# Altium PCB SNA.PcbDoc
Units mm, origin at the board's own origin, x right, y up, seen from the top; angles counter-clockwise.
Board outline 35.98 x 47.66 mm, 4 copper layers (Top Layer, Internal Plane 1, Internal Plane 2, Bottom Layer), stack 0.758 mm thick; 135 components, 90 nets, 432 pads, 225 vias.
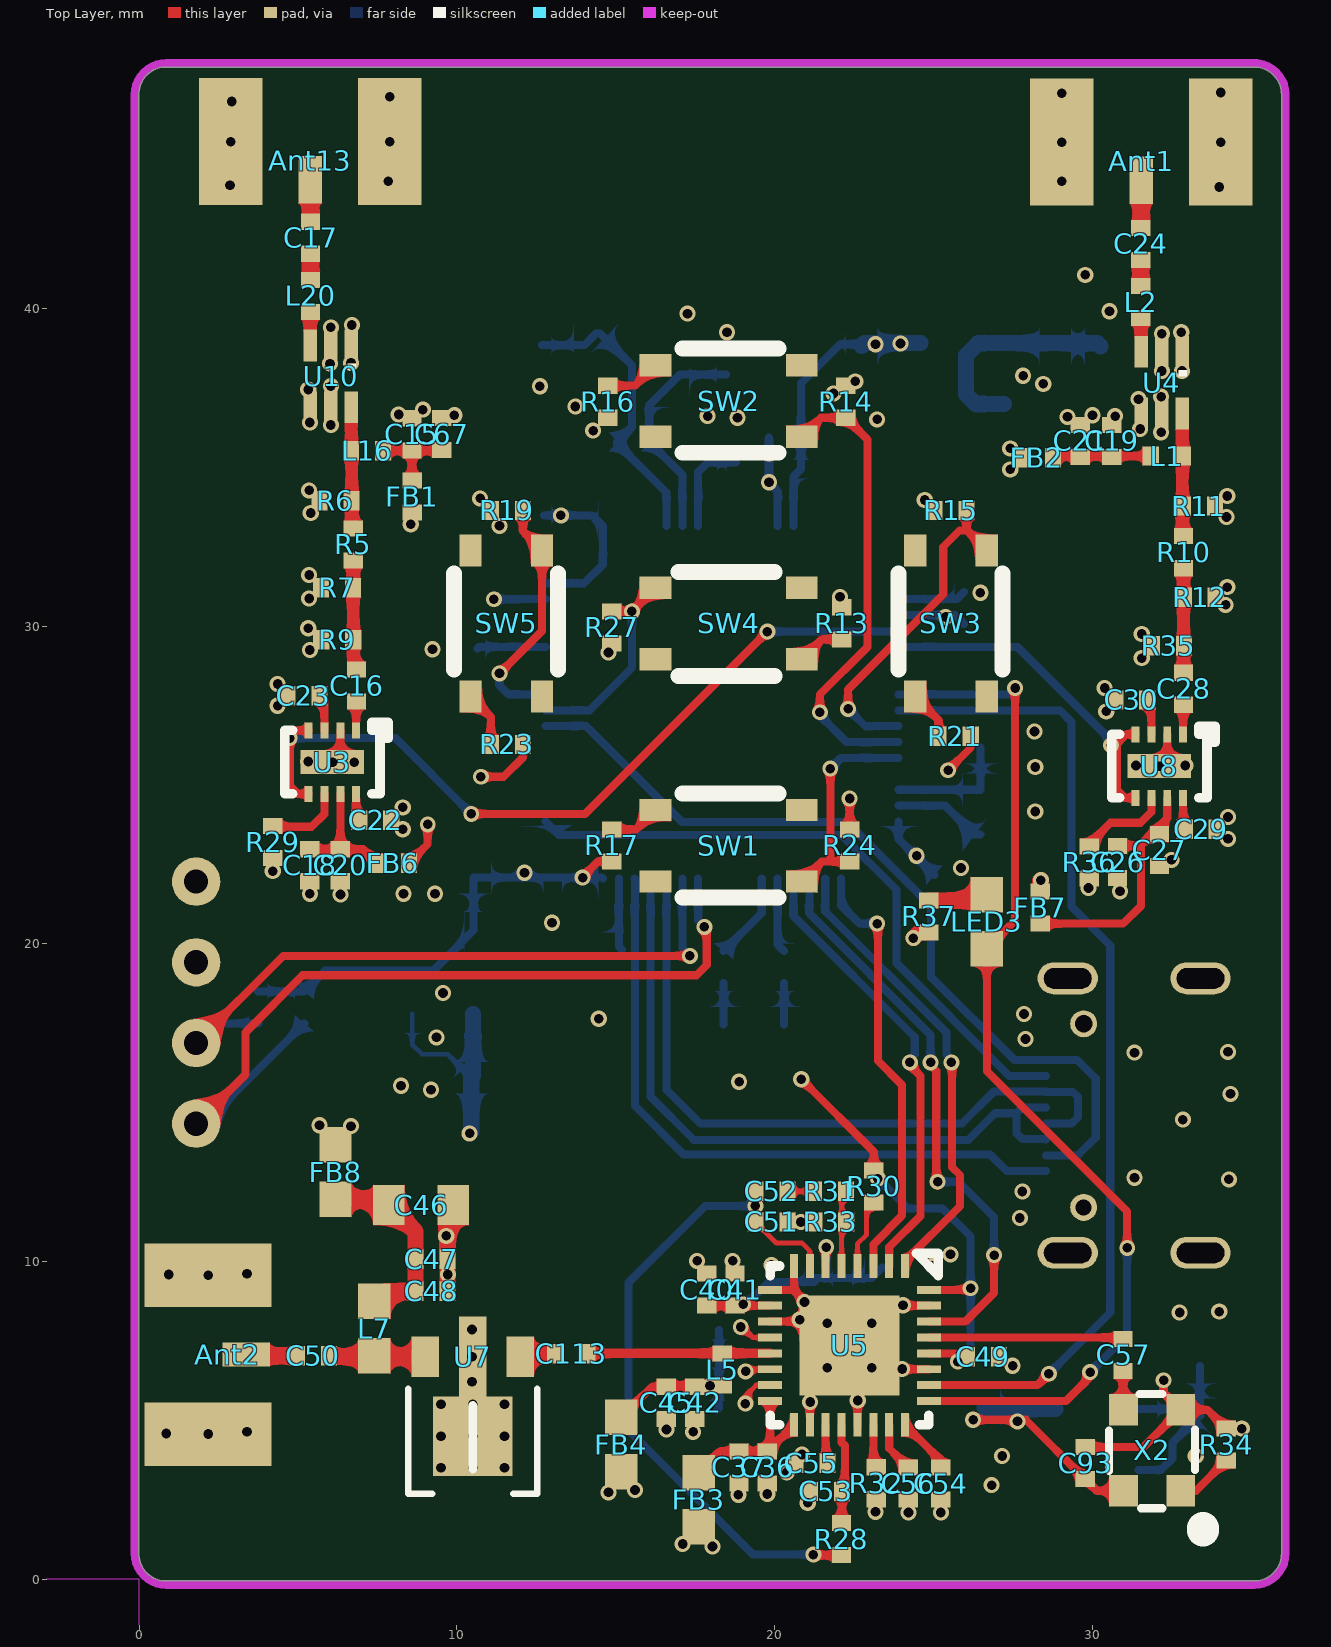
[diagram p0: Top Layer view]
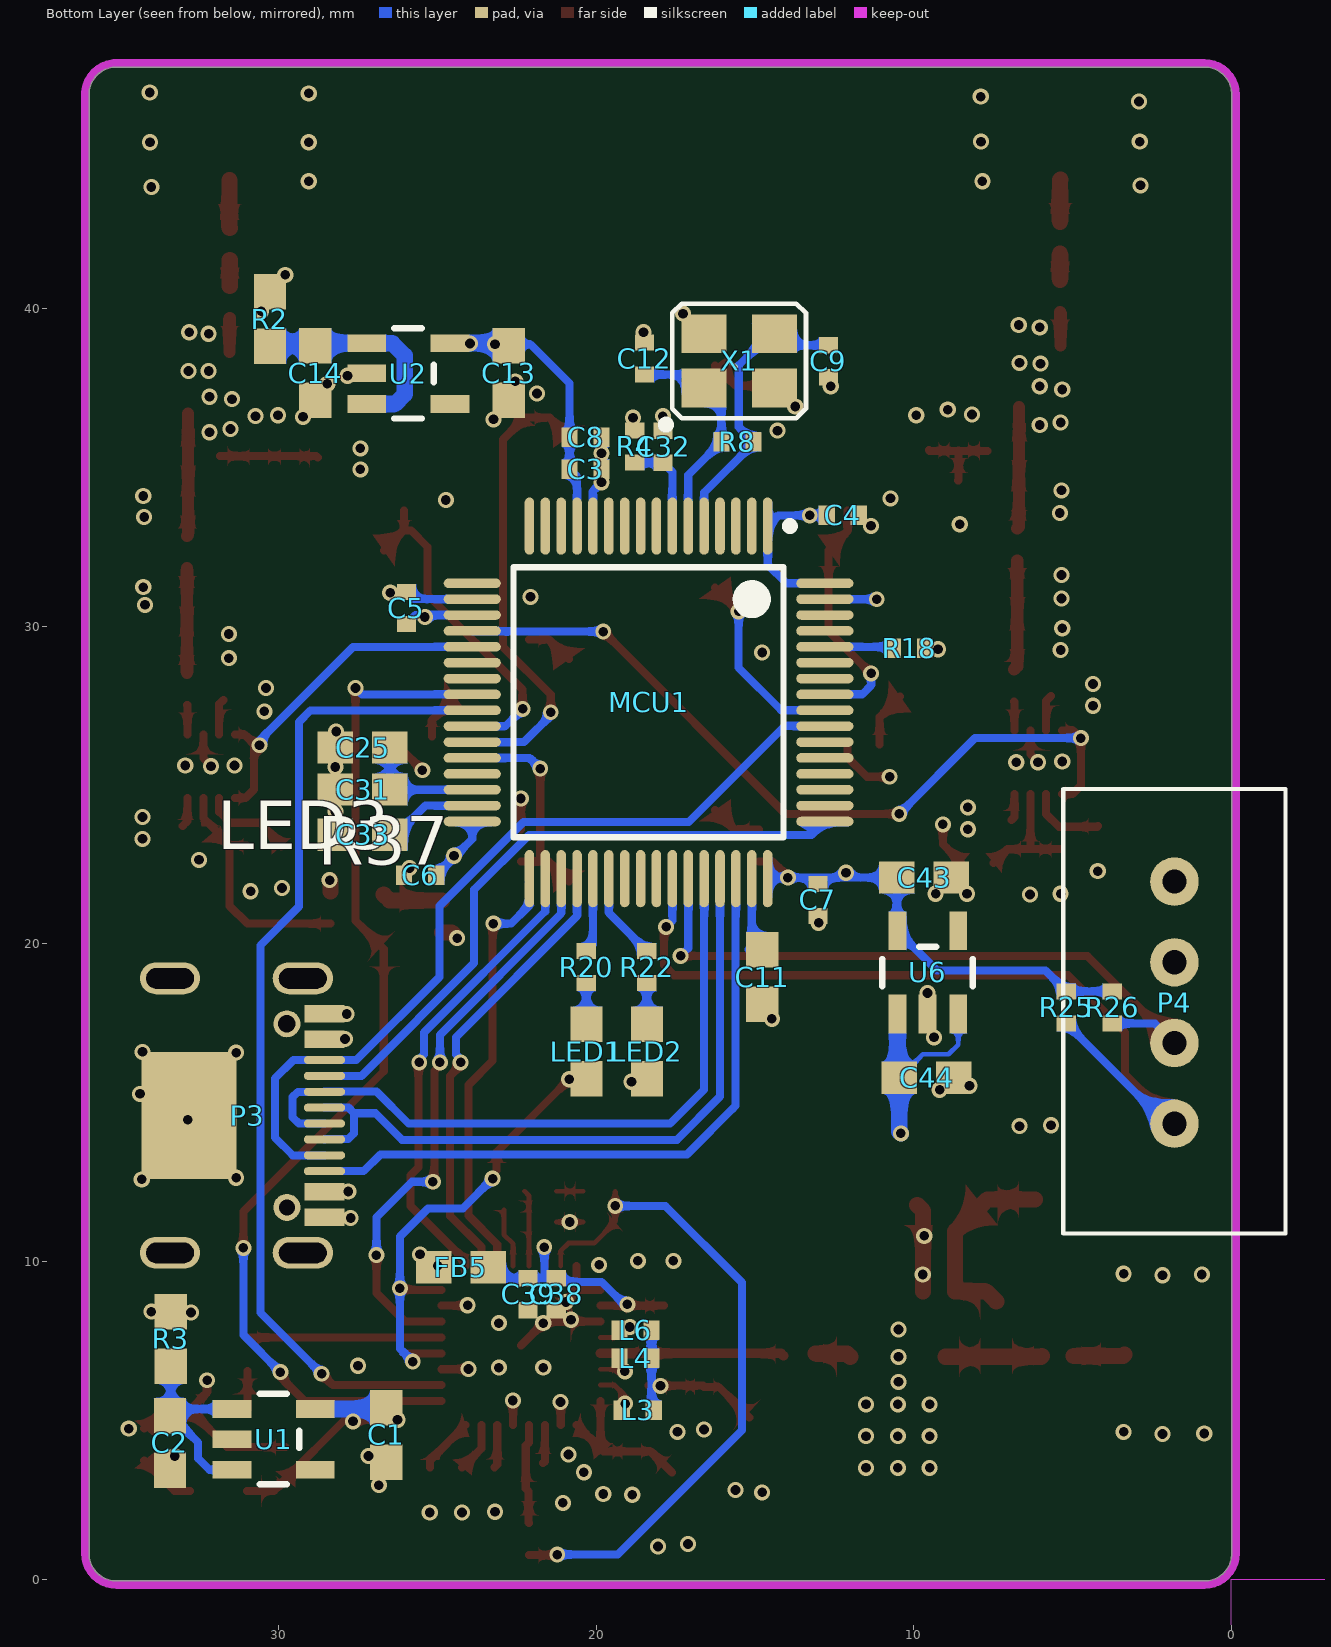
[diagram p1: Bottom Layer view, seen from below]
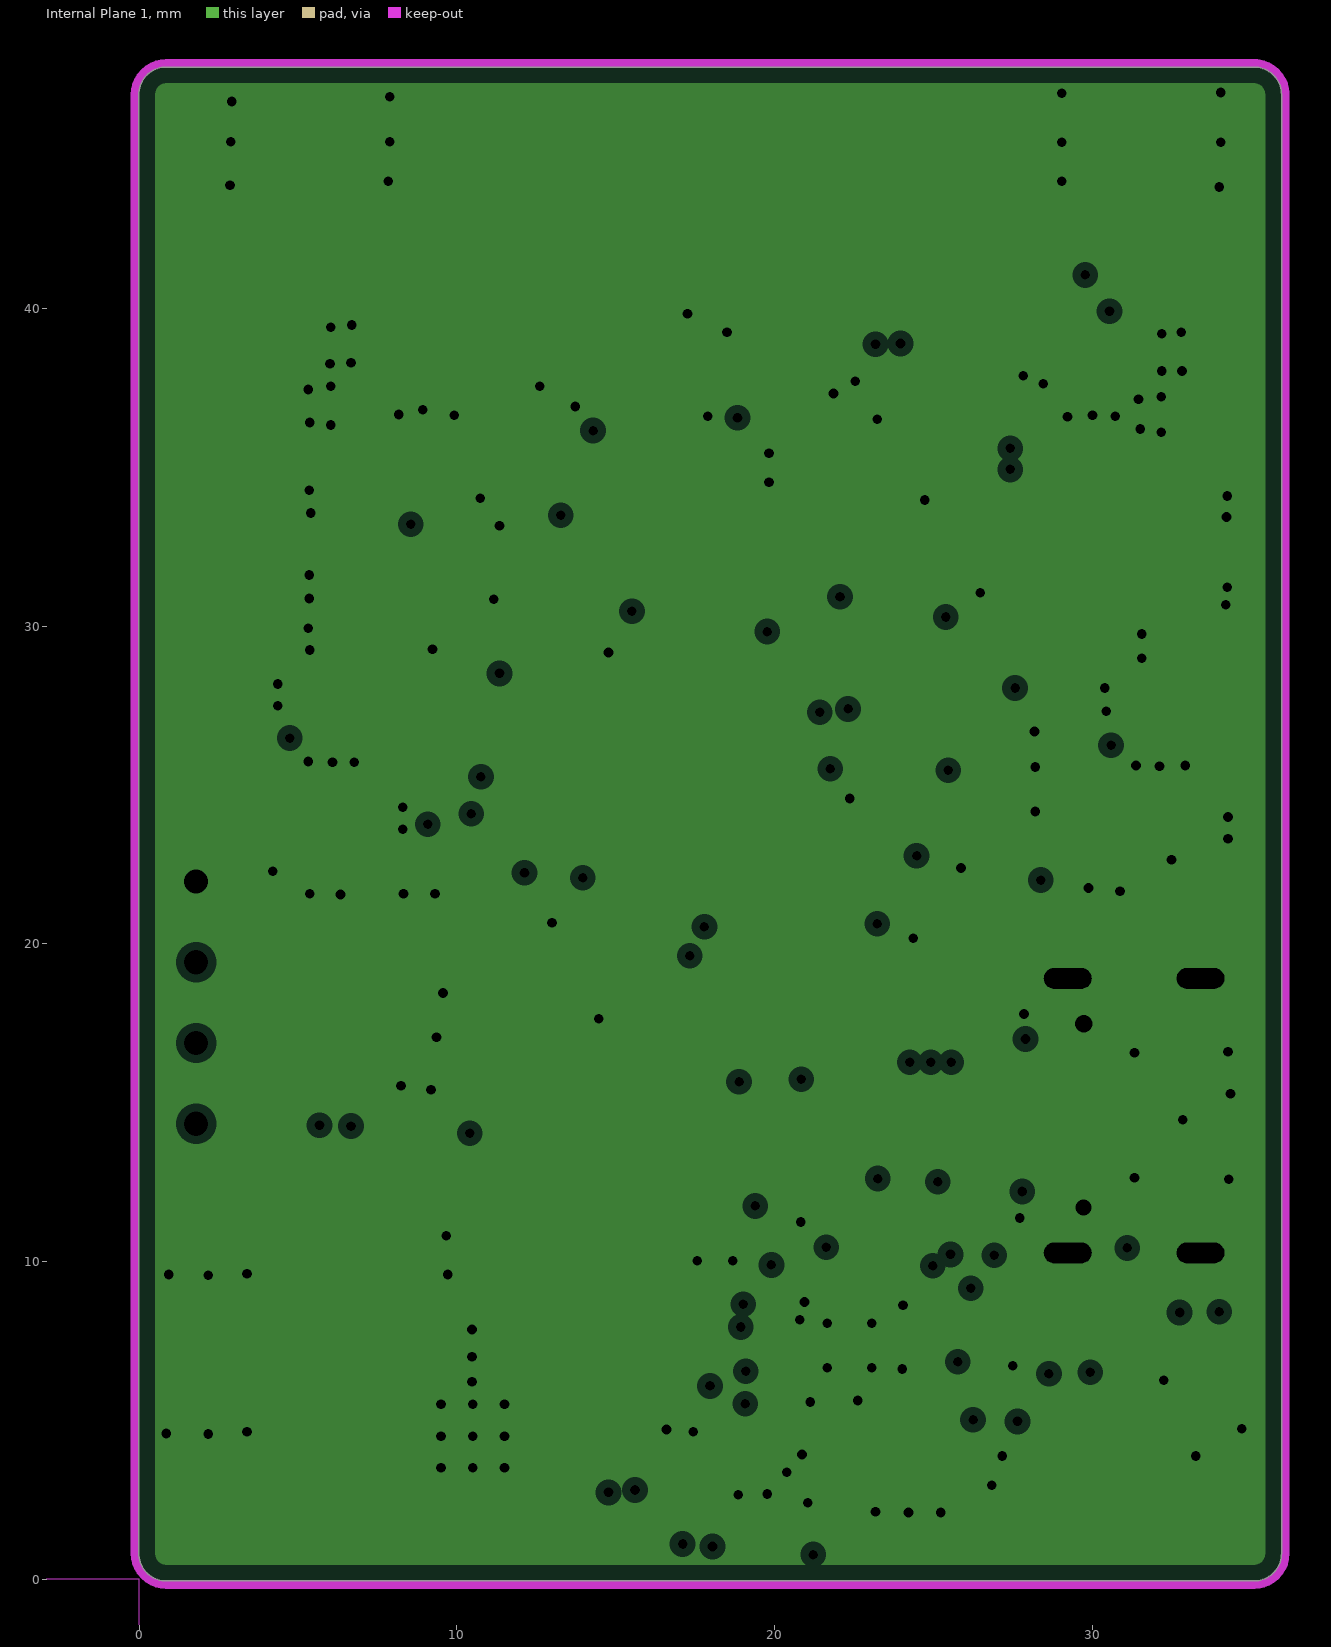
[diagram p2: Internal Plane 1, clearances drawn from the general rule]
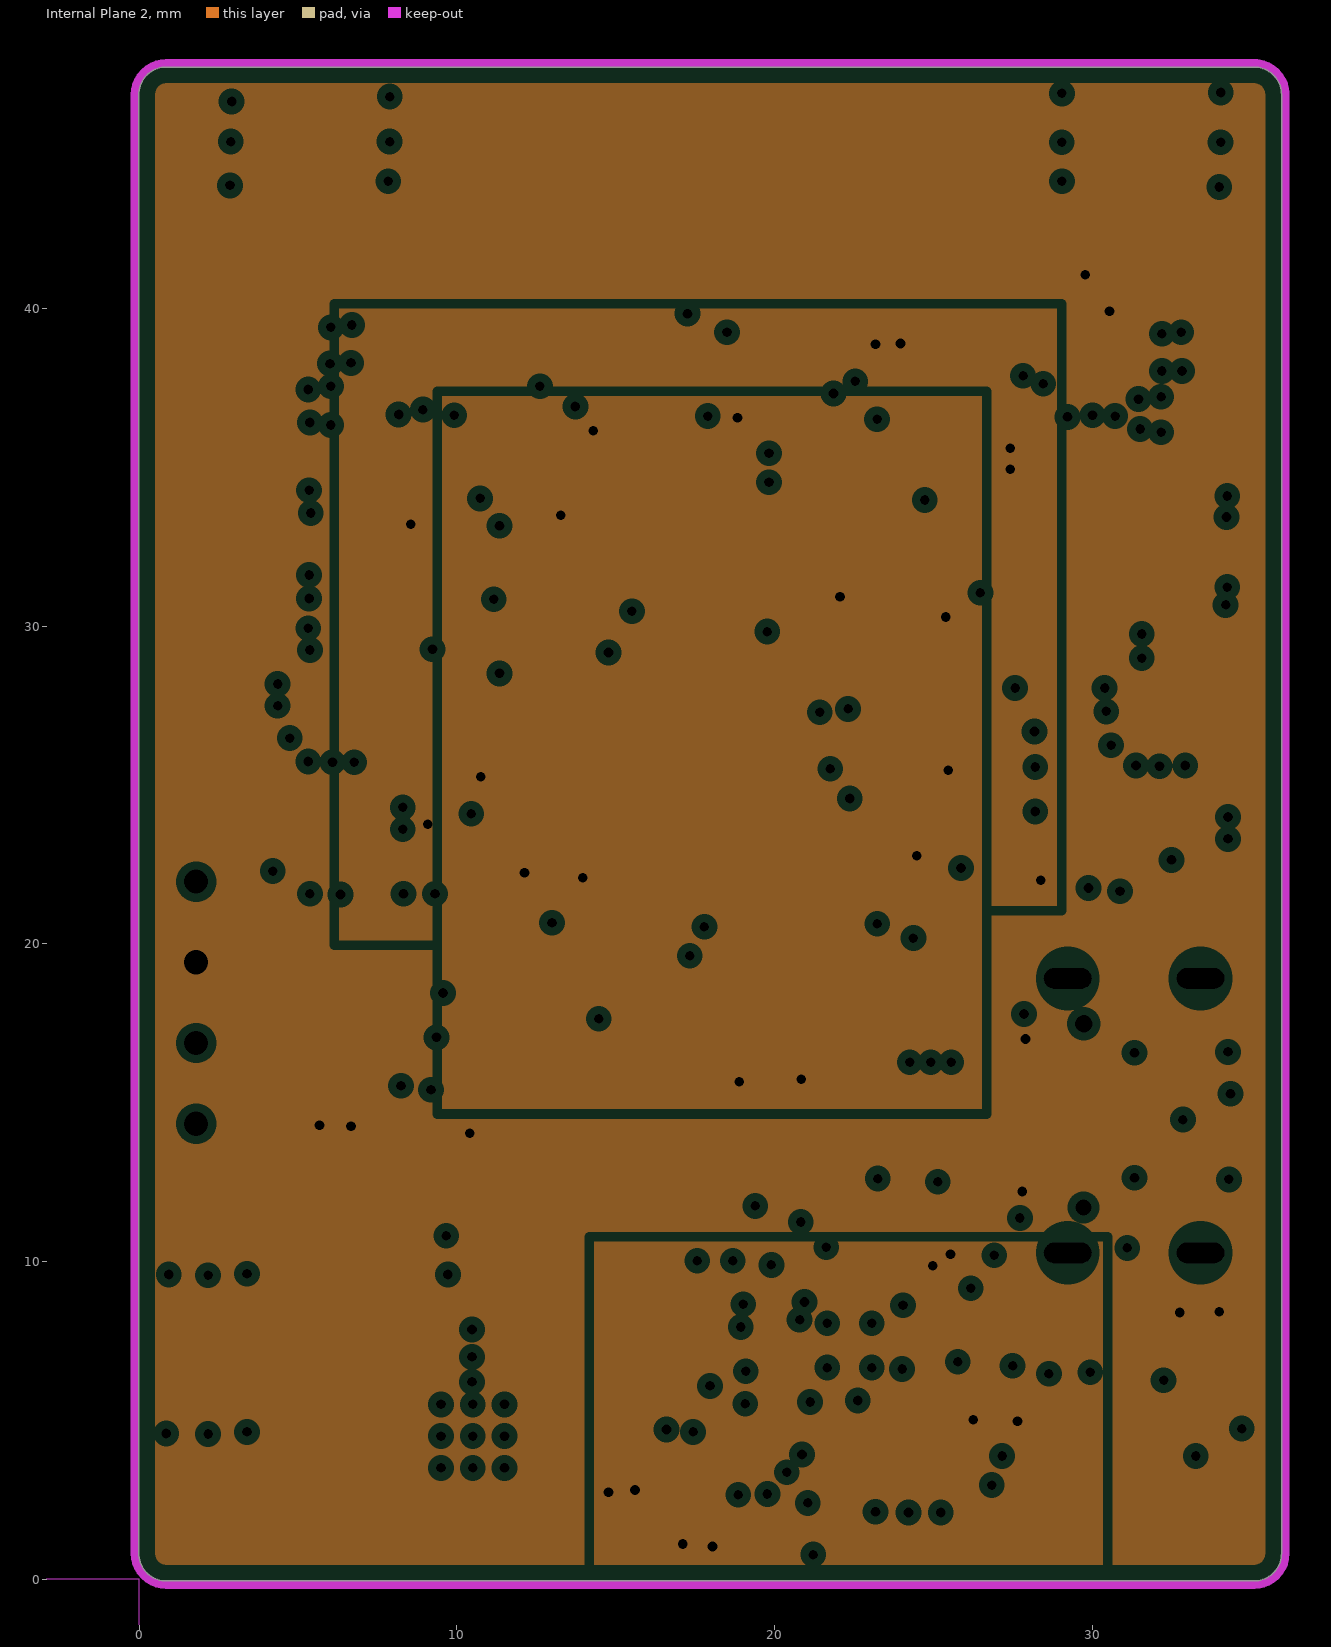
[diagram p3: Internal Plane 2, clearances drawn from the general rule]

## Layer stack, top to bottom
Top Solder: solder mask 0.0102, Solder Resist, Dk 3.8
Top Layer: signal copper 0.0356
Dielectric 1: prepreg 0.1803, Dk 4.6
Internal Plane 1: plane copper 0.036, net GND
Dielectric 3: core 0.254, Dk 4.6
Internal Plane 2: plane copper 0.036, net (Multiple Nets)
Dielectric 4: prepreg 0.1803, Dk 4.6
Bottom Layer: signal copper 0.0356
Bottom Solder: solder mask 0.0102, Solder Resist, Dk 3.8

## Board outline
-0.015,0.812 -0.015,46.729 cw(c0.857,46.729) 0.857,47.602 35.091,47.602 cw(c35.091,46.729) 35.963,46.729 35.963,0.812 cw(c35.091,0.812) 35.091,-0.061 0.857,-0.061 cw(c0.857,0.812)

## Design rules (kind name [scope] priority, off if disabled: settings)
Clearance [All] p1: gap=0.152
DiffPairsRouting [All] p1: maxlimit=0.254 minlimit=0.254 mostfreqgap=0.254 toplayer_minwidth=0.152 toplayer_maxwidth=0.381 toplayer_prefwidth=0.381 bottomlayer_minwidth=0.152 bottomlayer_maxwidth=0.381 bottomlayer_prefwidth=0.381 maxuncoupledlength=12.7
MinimumSolderMaskSliver [All] p1 off: minsoldermaskwidth=0.254
PlaneClearance [All] p1: clearance=0.254
PlaneConnect [All] p1: planeconnectstyle=Direct reliefexpansion=0.508 reliefentries=4 reliefconductorwidth=0.254 reliefairgap=0.254
PolygonConnect [All] p1: connectstyle=Direct reliefconductorwidth=0.254 reliefentries=4 polygonreliefangle="90 Angle" airgapwidth=0.254
RoomDefinition source [InComponentClass('source')] p1 off: confinementstyle=ConfineIn formatcopy=TRUE lockcomponents=FALSE outline 26.026,37.3 258.436,37.3 258.436,46.19 26.026,46.19
RoomDefinition power [InComponentClass('power')] p2 off: confinementstyle=ConfineIn formatcopy=TRUE lockcomponents=FALSE outline 26.153,29.045 78.35,29.045 78.35,36.03 26.153,36.03
RoomDefinition mcu [InComponentClass('mcu')] p3 off: confinementstyle=ConfineIn formatcopy=TRUE lockcomponents=FALSE outline 26.153,10.884 279.518,10.884 279.518,27.902 26.153,27.902
RoomDefinition Detector [InComponentClass('Detector')] p4 off: confinementstyle=ConfineIn formatcopy=TRUE lockcomponents=FALSE outline 26.026,-0.546 259.833,-0.546 259.833,9.614 26.026,9.614
RoutingVias [All] p1: holewidth=0.305 width=0.508 viastyle="Through Hole" minholewidth=0.3 minwidth=0.5 maxholewidth=0.711 maxwidth=1.27
SilkToBoardRegionClearance [All] p1 off:
SilkToSilkClearance [All] p1 off: silktosilkclearance=0.254
SilkToSolderMaskClearance [IsPad] p1 off: minsilkscreentomaskgap=0.254 clearancetoexposedcopper=TRUE
SolderMaskExpansion [All] p1: expansion=0.102
UnpouredPolygon [All] p1: allowunpoured=FALSE
Width [All] p1: maxlimit=1.524 minlimit=0.152 preferedwidth=0.152
22 further rules are at their usual default settings.

## Classes and differential pairs
component class source: Ant2 C36 C37 C38 C39 C40 C41 C42 C45 C46 C47 C48 C49 C50 C51 C52 C53 C54 C55 C56 C57 C93 C113 FB3 FB4 FB5 FB8 L3 L4 L5 L6 L7 R28 R30 R31 R32 R33 R34 U5 U7 X2
component class power: C1 C2 C13 C14 C43 C44 R2 R3 U1 U2 U6
component class mcu: C3 C4 C5 C6 C7 C8 C9 C11 C12 C25 C31 C32 C33 LED1 LED2 LED3 MCU1 P3 P4 R4 R8 R13 R14 R15 R16 R17 R18 R19 R20 R21 R22 R23 R24 R25 R26 R27 R37 SW1 SW2 SW3 SW4 SW5 X1
component class Detector: Ant1 Ant13 C15 C16 C17 C18 C19 C20 C21 C22 C23 C24 C26 C27 C28 C29 C30 C67 FB1 FB2 FB6 FB7 L1 L2 L16 L20 R5 R6 R7 R9 R10 R11 R12 R29 R35 R36 U3 U4 U8 U10
differential pair TYPEC: +TYPEC_P -TYPEC_N

## Components (designator, comment, footprint, x,y, rotation, side; value= is the part's Value field where it differs from the comment)
Ant1 "Antenna" SMA-2 34.046,45.235 r180 top
Ant2 "Antenna" SMA-2 2.169,9.565 r270 top
Ant13 "Antenna" SMA-2 7.884,45.252 r180 top
C1 "4.7uF" 0603 26.608,4.532 r90 bottom
C2 "4.7uF" 0603 33.416,4.278 r90 bottom
C3 "1n" 0402 20.334,34.941 r180 bottom
C4 "0.1uF * 4" 0402 12.232,33.488 r0 bottom
C5 "1n" 0402 25.969,30.571 r270 bottom
C6 "1n" 0402 25.542,22.159 r180 bottom
C7 "1n" 0402 13.015,21.376 r90 bottom
C8 "1n" 0402 20.334,35.941 r180 bottom
C9 "22pF" 0402 12.684,38.344 r270 bottom
C11 "2.2uF" 0603 14.772,18.959 r270 bottom
C12 "22pF" 0402 18.476,38.42 r90 bottom
C13 "4.7uF" 0603 22.748,37.958 r90 bottom
C14 "4.7uF" 0603 28.844,37.958 r90 bottom
C15 "1nF" 0402 8.586,36.042 r270 top
C16 "1nF" 0402 6.842,28.133 r270 top
C17 "1nF" 0402 5.395,42.23 r270 top
C18 "1nF" 0402 5.369,22.469 r90 top
C19 "1nF" 0402 30.617,35.837 r270 top
C20 "1nF" 0402 6.334,22.469 r90 top
C21 "1nF" 0402 29.626,35.837 r270 top
C22 "1nF" 0402 7.427,23.891 r0 top
C23 "1nF" 0402 5.166,27.803 r0 top
C24 "1nF" 0402 31.531,42.035 r270 top
C25 "4.7uF" 0603 27.34,26.177 r0 bottom
C26 "1nF" 0402 30.799,22.566 r90 top
C27 "1nF" 0402 32.12,22.947 r90 top
C28 "1nF" 0402 32.877,28.031 r270 top
C29 "1nF" 0402 33.416,23.607 r0 top
C30 "1nF" 0402 31.226,27.676 r0 top
C31 "4.7uF" 0603 27.34,24.856 r0 bottom
C32 "0.1uF" 0402 17.891,35.651 r270 bottom
C33 "2.2uF" 0603 27.34,23.434 r0 bottom
C36 "0.1uF" 0402 19.771,3.52 r270 top
C37 "0.1uF" 0402 18.882,3.52 r270 top
C38 "0.1uF" 0402 21.254,8.972 r270 bottom
C39 "0.1uF" 0402 22.143,8.972 r270 bottom
C40 "0.1uF" 0402 17.866,9.108 r90 top
C41 "0.1uF" 0402 18.755,9.108 r90 top
C42 "0.1uF" 0402 17.485,5.552 r270 top
C43 "4.7uF" 0603 9.667,22.083 r0 bottom
C44 "4.7uF" 0603 9.59,15.784 r0 bottom
C45 "0.1uF" 0402 16.596,5.552 r270 top
C46 "12nF" 0805 8.874,11.775 r180 top
C47 "1nF" 0402 9.205,10.073 r180 top
C48 "100pF" 0402 9.205,9.057 r180 top
C49 "0.1uF" 0402 26.558,6.995 r0 top
C50 "12nF" 0402 5.471,7.025 r180 top
C51 "12nF" 0402 19.898,11.242 r0 top
C52 "0.1uF" 0402 19.898,12.207 r0 top
C53 "820p" 0402 21.625,2.758 r180 top
C54 "1uF" 0402 25.232,3.012 r270 top
C55 "1uF" 0402 21.168,3.647 r180 top
C56 "1uF" 0402 24.216,3.012 r270 top
C57 "0R/0.1uF" 0402 30.972,7.051 r90 top
C67 "1nF" 0402 9.519,36.048 r270 top
C93 "0.1uF" 0402 29.779,3.647 r90 top
C113 "12nF" 0402 13.604,7.097 r180 top
FB1 "FB" 0402 8.6,34.072 r90 top
FB2 "FB" 0402 28.255,35.304 r0 top
FB3 "FB" 0603 17.612,2.504 r270 top
FB4 "FB" 0603 15.178,4.227 r90 top
FB5 "FB" 0603 24.246,9.815 r0 bottom
FB6 "FB" 0402 7.99,22.54 r180 top
FB7 "FB" 0402 28.361,21.143 r270 top
FB8 "FB" 0603 6.182,12.817 r270 top
L1 "Inductor" 0402 32.344,35.354 r0 top
L2 "Inductor" 0402 31.531,40.206 r270 top
L3 "Inductor" 0402 18.684,5.319 r0 bottom
L4 "Inductor" 0402 18.755,6.949 r0 bottom
L5 "Inductor" 0402 18.353,6.589 r90 top
L6 "Inductor" 0402 18.755,7.838 r0 bottom
L7 "Inductor" 0603 7.401,7.889 r270 top
L16 "Inductor" 0402 7.177,35.52 r180 top
L20 "Inductor" 0402 5.395,40.401 r270 top
LED1 "LED0" 0603 20.304,16.601 r90 bottom
LED2 "LED0" 0603 18.399,16.601 r90 bottom
LED3 "LED0" 0603 26.685,20.686 r90 top
MCU1 "STM32F103R8T6" LQFP64_N 18.349,27.599 r270 bottom
P3 "USBC" USBTC 31.003,14.59 r270 bottom
P4 "UART/I2C" 4pSocket 1.793,16.876 r90 bottom
R2 "100" 0603 30.266,39.66 r90 bottom
R3 "100" 0603 33.39,7.554 r90 bottom
R4 "10k" 0402 18.78,35.651 r90 bottom
R5 "240" 0402 6.741,32.578 r270 top
R6 "240" 0402 6.182,33.949 r180 top
R7 "240" 0402 6.233,31.206 r180 top
R8 "" 0402 15.555,35.804 r180 bottom
R9 "240" 0402 6.238,29.576 r180 top
R10 "240" 0402 32.877,32.332 r270 top
R11 "240" 0402 33.36,33.78 r0 top
R12 "240" 0402 33.385,30.909 r0 top
R13 "1k" 0402 22.113,30.084 r90 top
R14 "10k" 0402 22.24,37.069 r270 top
R15 "10k" 0402 25.542,33.64 r0 top
R16 "1k" 0402 14.747,37.069 r270 top
R17 "1k" 0402 14.874,23.099 r270 top
R18 "10k" 0402 10.144,29.301 r0 bottom
R19 "10k" 0402 11.572,33.64 r0 top
R20 "10k" 0402 20.304,19.268 r270 bottom
R21 "1k" 0402 25.669,26.528 r0 top
R22 "10k" 0402 18.399,19.268 r270 bottom
R23 "1k" 0402 11.572,26.274 r0 top
R24 "10k" 0402 22.367,23.099 r270 top
R25 "10k" 0402 5.196,17.994 r90 bottom
R26 "10k" 0402 3.748,17.994 r90 bottom
R27 "10k" 0402 14.874,29.957 r90 top
R28 "240" 0402 22.108,1.26 r270 top
R29 "240" 0402 4.201,23.205 r270 top
R30 "10k" 0402 23.129,12.355 r90 top
R31 "30.1" 0402 21.752,12.207 r180 top
R32 "5.1k" 0402 23.2,3.012 r90 top
R33 "90.9" 0402 21.752,11.242 r0 top
R34 "0R" 0402 34.224,4.231 r90 top
R35 "240" 0402 32.395,29.377 r180 top
R36 "240" 0402 29.91,22.566 r270 top
R37 "10k" 0402 24.856,20.864 r270 top
SW1 "SW-PB" SW3x4 18.557,23.084 r180 top
SW2 "SW-PB" SW3x4 18.557,37.084 r180 top
SW3 "SW-PB" SW3x4 25.557,30.084 r270 top
SW4 "SW-PB" SW3x4 18.557,30.084 r0 top
SW5 "SW-PB" SW3x4 11.557,30.084 r270 top
U1 "RT9013-28GB" SOT23-5 30.164,4.405 r270 bottom
U2 "RT9013-28GB" SOT23-5 25.923,37.958 r270 bottom
U3 "AD8319" AD8319 6.08,25.72 r180 top
U4 "MGA81563" SC-70-6 32.192,37.666 r90 top
U5 "MAX2871" MAX2871 22.362,7.356 r270 top
U6 "RT9013-28GB" SOT23-5 9.564,19.088 r180 bottom
U7 "AMP-SOT89" SOT-89 10.5,7 r180 top
U8 "AD8319" AD8319 32.115,25.593 r180 top
U10 "MGA81563" SC-70-6 6.03,37.861 r90 top
X1 "8mhz" OSCILLATOR-3.2X2.5 15.504,38.344 r180 bottom
X2 "OSC_40M" TXC_7Q 31.887,4.054 r90 top

## Footprints (in the part's own frame and the unit in brackets; to place one, negate y for a bottom-side part, rotate by r counter-clockwise, add the part's x,y. Pads: shape width x height; smd on the part's side, far side on the other; paste and mask are expansions set on the pad)
4pSocket [mil]
  round 60 hole 30: 1(-100,0) 2(0,0) 3(100,0) 4(200,0)
  silkscreen extent -236,-138 315,138
0402 [mil] "0402-RES"
  rect 20x24 smd: 1(-19.69,0) 2(20,0)
0603 [mil] "0603-RES"
  rect 44x40 smd: 1(-33.46,0) 2(34,0)
0805 [mm]
  rect 1x1.27 smd: 1(-1.016,0) 2(1.016,0)
  body extent -1.27,-0.76 1.27,0.76, height 0.8
AD8319 [mm]
  rect 2x0.75 smd: 0(0,0)
  rect 0.25x0.5 smd: 1(-0.75,-1) 2(-0.25,-1) 3(0.25,-1) 4(0.75,-1) 5(0.75,1) 6(0.25,1) 7(-0.25,1) 8(-0.75,1)
  silkscreen extent -1.75,-1.25 1.5,1, body extent -1.5,-1 1.5,1, height 0.75
LQFP64_N [mm]
  oval 1.8x0.3 smd: 1(-5.55,3.75) 2(-5.55,3.25) 3(-5.55,2.75) 4(-5.55,2.25) 5(-5.55,1.75) 6(-5.55,1.25) 7(-5.55,0.75) 8(-5.55,0.25) 9(-5.55,-0.25) 10(-5.55,-0.75) 11(-5.55,-1.25) 12(-5.55,-1.75) 13(-5.55,-2.25) 14(-5.55,-2.75) 15(-5.55,-3.25) 16(-5.55,-3.75) 33(5.55,-3.75) 34(5.55,-3.25) 35(5.55,-2.75) 36(5.55,-2.25) 37(5.55,-1.75) 38(5.55,-1.25) 39(5.55,-0.75) 40(5.55,-0.25) 41(5.55,0.25) 42(5.55,0.75) 43(5.55,1.25) 44(5.55,1.75) 45(5.55,2.25) 46(5.55,2.75) 47(5.55,3.25) 48(5.55,3.75)
  oval 0.3x1.8 smd: 17(-3.75,-5.55) 18(-3.25,-5.55) 19(-2.75,-5.55) 20(-2.25,-5.55) 21(-1.75,-5.55) 22(-1.25,-5.55) 23(-0.75,-5.55) 24(-0.25,-5.55) 25(0.25,-5.55) 26(0.75,-5.55) 27(1.25,-5.55) 28(1.75,-5.55) 29(2.25,-5.55) 30(2.75,-5.55) 31(3.25,-5.55) 32(3.75,-5.55) 49(3.75,5.55) 50(3.25,5.55) 51(2.75,5.55) 52(2.25,5.55) 53(1.75,5.55) 54(1.25,5.55) 55(0.75,5.55) 56(0.25,5.55) 57(-0.25,5.55) 58(-0.75,5.55) 59(-1.25,5.55) 60(-1.75,5.55) 61(-2.25,5.55) 62(-2.75,5.55) 63(-3.25,5.55) 64(-3.75,5.55)
  silkscreen extent -5.67,-4.25 4.25,4.57
MAX2871 [mm]
  rect 3.15x3.15 smd: 0(0,0)
  rect 0.75x0.25 smd: 1(-2.5,1.75) 2(-2.5,1.25) 3(-2.5,0.75) 4(-2.5,0.25) 5(-2.5,-0.25) 6(-2.5,-0.75) 7(-2.5,-1.25) 8(-2.5,-1.75) 17(2.5,-1.75) 18(2.5,-1.25) 19(2.5,-0.75) 20(2.5,-0.25) 21(2.5,0.25) 22(2.5,0.75) 23(2.5,1.25) 24(2.5,1.75)
  rect 0.25x0.75 smd: 9(-1.75,-2.5) 10(-1.25,-2.5) 11(-0.75,-2.5) 12(-0.25,-2.5) 13(0.25,-2.5) 14(0.75,-2.5) 15(1.25,-2.5) 16(1.75,-2.5) 25(1.75,2.5) 26(1.25,2.5) 27(0.75,2.5) 28(0.25,2.5) 29(-0.25,2.5) 30(-0.75,2.5) 31(-1.25,2.5) 32(-1.75,2.5)
  silkscreen extent -2.9,-2.5 2.5,2.8, body extent -2.5,-2.5 2.5,2.5, height 0.7
OSCILLATOR-3.2X2.5 [mil] "OSCILLATOR-3.2X2.5"
  rect 56x48 smd: 1(-43.31,-33.46) 2(44,-33.46) 3(44,34) 4(-43.31,34)
  silkscreen extent -95,-83 83,71
SC-70-6 [mm]
  rect 1x0.42 smd mask+0.051: 1(0.97,-0.65) 2(0.97,0) 3(0.97,0.65) 4(-0.97,0.65) 5(-0.975,0) 6(-0.97,-0.65)
  silkscreen extent 0.2,-0.8 0.4,-0.53
SMA-2 [mm]
  rect 0.75x1.5 smd: 1(2.5,1.2)
  rect 2x4 smd: GND(0,0) GND(5,0)
  Top Layer pour cut-out: 1,2 4,2 4,-2 1,-2
SOT23-5 [mil] "SOT23-5"
  rect 22x48 smd: 1(-37.4,-51.19) 2(0,-51.19) 3(38,-51.19) 4(38,52) 5(-37.4,52)
  silkscreen extent -56,-17 56,32
SOT-89 [mil]
  rect 34x50 smd: 1(-59.06,0) 3(59.06,0)
  rect 34x100 smd: 2(0,0)
  silkscreen extent -80,40 80,170
SW3x4 [mm]
  rect 1x0.7 smd: 1(-2.3,1.125) 2(2.3,-1.125) 3(2.3,1.125) 4(-2.3,-1.125)
  silkscreen extent -1.58,-1.65 1.45,1.63, body extent -2,-1.5 2,1.5, height 2.6
TXC_7Q [mm]
  rect 1x0.9 smd: 1(-1.275,-0.9) 2(1.275,-0.9) 3(1.275,0.9) 4(-1.275,0.9)
  silkscreen extent -2.52,-1.6 1.78,1.35
USBTC [mm]
  oval 0.25x1.3 smd paste-0.01 mask+0.03: CC1(-1.25,2.45) CC2(1.75,2.45) DN(-0.75,2.45) DN(0.25,2.45) DP(-0.25,2.45) DP(0.75,2.45) SBU1(1.25,2.45) SBU2(-1.75,2.45)
  oval 1x1.9 hole 0.65 slot 1.5 at 90 deg paste+0 mask+0.03: GND(-4.32,-2.41) GND(-4.32,1.77) GND(4.32,-2.41) GND(4.32,1.77)
  rect 0.55x1.25 smd paste-0.01 mask+0.03: GND(-3.2,2.45) GND(3.2,2.45) VBUS(-2.4,2.45) VBUS(2.4,2.45)
  round 0.85 hole 0.55 paste-1 mask+0: GND(-2.89,1.27)
  rect 4x3 smd mask+0.4: GND(0,-1.81)
  round 0.85 hole 0.5 paste-1 mask+0: GND(2.89,1.27)

## Part data
C1 C2 C13 C14 C15 C16 C17 C18 C19 C20 C21 C22 C23 C24 C26 C27 C28 C29 C30 C43 C44 C67: library part Cap, "Capacitor"
C3 C4 C5 C6 C7 C8 C9 C11 C12 C25 C31 C32 C33 C36 C37 C38 C39 C40 C41 C42 C45 C46 C47 C48 C49 C50 C51 C52 C53 C54 C55 C56 C57 C93 C113: library part CAP0402-CAP, "<b>Capacitor</b> / Standard 0603 ceramic capacitor, and 0.1\" leaded capacitor."
FB1 FB2 FB3 FB4 FB5 FB6 FB7 FB8 R2 R3 R4 R5 R6 R7 R8 R9 R10 R11 R12 R13 R14 R15 R16 R17 R18 R19 R20 R21 R22 R23 R24 R25 R26 R27 R28 R29 R30 R31 R32 R33 R34 R35 R36 R37: library part Res2, "Resistor"
LED1 LED2 LED3: "Typical INFRARED GaAs LED"
MCU1: "STM32 ARM-based 32-bit MCU with 64 Kbytes Flash, 64-pin LQFP, Industrial Temperature"
P4: library part 4PSocket
SW1 SW2 SW3 SW4 SW5: "Switch"
U1 U2 U6: library part LP5907
X1: library part OSCILLATOR-3.2X2.5, "Crystal Oscillator in 3.2x2.5 SMD"

## Free pads (board coordinates)
  rect 2.5x2.5 smd: 0(10.5,4.5)

## Via types
v1: diameter 0.508, hole 0.305, Top Layer to Bottom Layer, 185 vias
v2: diameter 0.5, hole 0.3, Top Layer to Bottom Layer, 40 vias

## Nets (pads, with @x,y where several pads share a name; then routed paths per layer and width w, separated by ;. In a path a pad name is that pad's centre, name@x,y a point inside that pad or via, vN(x,y) a via of type N, cw(c..) or ccw(c..) an arc to the next point about the centre after c; other vN are vias at no path point)
3.3A: C3.1 C8.1 C13.2 FB1.1 FB2.1 FB6.1 FB7.1 MCU1.13 U2.5 | length 11.2
  Top Layer w0.254: FB6.1 9.082,23.132 v2(9.082,23.759)
  Top Layer w0.508: FB7.1 28.361,21.981 v2(28.386,22.007)
  Bottom Layer w0.254: MCU1.13 20.599,34.705 C3.1 C8.1 20.834,37.645 22.062,38.872 22.798,38.872 v1(23.179,38.872)
  Bottom Layer w0.508: C13.2 22.798,38.872 22.834,38.908 U2.5
  other v1: 8.549,33.208 27.421,34.935 27.421,35.596 23.967,38.898
3.3D: C4.2 C5.2 C6.2 C7.2 C43.2 C49.1 LED1.1 LED2.1 MCU1.1 MCU1.19 MCU1.32 MCU1.48 MCU1.64 R4.2 R13.2 R16.2 R17.2 R21.2 R23.2 R25.2 R26.2 R30.2 U5.28 U5.32 U6.5 | length 42.4
  Top Layer w0.254: v2(10.759,25.258) 11.47,25.258 12.08,25.868 R23.2 ; v2(13.959,22.083) 13.934,22.083 14.442,22.591 R17.2 ; v1(20.843,15.733) 23.129,13.447 R30.2 ; U5.28 25.796,7.106 ; U5.32 26.128,9.106 v2(26.177,9.154) ; v2(25.465,25.461) 26.177,26.172 R21.2 ; v2(25.77,6.843) 25.77,7.08 25.796,7.106 ; C49.1@26.058,7.122 26.041,7.106 25.796,7.106
  Bottom Layer w0.254: R26.2 R25.2 5.857,19.162 9.267,19.162 U6.5 10.53,20.426 C43.2 v2(13.959,22.083) 14.565,22.083 MCU1.48 ; C4.2 v2(13.273,33.488) ; MCU1.64 14.005,31.349 14.599,31.943 MCU1.1 14.26,33.488 v2(13.273,33.488) ; 13.781,33.488 v2(13.273,33.488) ; v2(23.256,12.609) 24.195,11.669 25.288,11.669 26.177,10.78 v2(26.177,9.154) 26.177,7.249 v2(25.77,6.843) ; MCU1.32 23.899,23.294 C6.2 ; MCU1.19 25.682,30.349 C5.2
  other v1: 18.887,15.657 12.13,22.235 24.475,22.769 25.389,30.287 22.062,30.922 14.289,36.155 18.836,36.561
3.3Synth: C1.2 C93.1 FB3.2 FB4.1 FB5.2 U1.5 X2.4 | length 7.9
  Top Layer w0.254: v1(26.253,5.014) 27.912,5.014 C93.1 30.147,2.779 X2.4
  Bottom Layer w0.508: C1.2 26.649,5.355 U1.5
  other v1: 18.049,1.026 17.109,1.103 14.772,2.728 15.61,2.804 27.65,4.963 24.983,9.866 25.542,10.221
5V: C44.2 FB8.1 P3.VBUS P4.3 R2.2 R3.2 U6.1 U6.3 | length 7.1
  Bottom Layer w0.152: U6.3 8.598,16.827 8.905,16.52 9.717,16.52 C44.2
  Bottom Layer w0.508: v2(10.403,14.031) 10.454,14.082 C44.2 10.514,15.843 U6.1
  other v1: 32.755,8.392 34,8.418 27.802,12.202 6.669,14.26 5.679,14.285 27.904,17.003 30.545,39.914 29.783,41.057
AGND: U1.2
CLOCK40M: C57.2 U5.29 | length 6.1
  Top Layer w0.254: U5.29 30.926,7.606 C57.2
GND: Ant1.GND Ant2.GND Ant13.GND C1.1 C2.1 C3.2 C4.1 C5.1 C6.1 C7.1 C8.2 C9.2 C11.2 C12.2 C13.1 C14.1 C15.1 C18.1 C19.1 C20.1 C21.1 C22.2 C23.1 C25.2 C26.1 C27.1 C29.2 C30.1 C31.2 C32.1 C33.2 C36.2 C37.2 C38.2 C39.2 C40.2 C41.2 C42.2 C43.1 C44.1 C45.2 C46.1 C47.1 C48.1 C49.2 C51.2 C53.2 C54.2 C55.2 C56.2 C67.1 C93.2 MCU1.12 MCU1.18 MCU1.63 P3.GND P4.4 pad.0 R6.2 R7.2 R9.2 R11.2 R12.2 R14.1 R15.1 R18.1 R19.1 R24.1 R27.1 R29.2 R32.1 R33.1 R34.2 R35.2 R36.2 R37.2 U2.2 U3.0 U3.2 U4.1 U4.2 U4.4 U4.5 U5.0 U5.8 U5.9 U5.11 U5.18 U5.21 U5.27 U5.31 U6.2 U7.2 U8.0 U8.2 U10.1 U10.2 U10.4 U10.5 X1.2 X1.4 X2.2 | length 28.4
  Top Layer w0.152: C51.2 R33.1
  Top Layer w0.254: U3.0 6.33,25.97 U3.2 ; U5.11 21.612,8.106 v1(21.662,8.056) U5.0 ; U5.9 20.587,9.106 20.612,9.08 ; U5.8 20.612,9.08 ; v1(20.944,8.723) 20.944,8.748 20.612,9.08 ; U5.18 21.112,5.563 v1(21.122,5.573) ; R24.1 v1(22.367,24.572) ; U5.21 22.612,5.615 v1(22.621,5.624) ; v1(24.018,6.614) 24.026,6.606 U5.27 ; v1(24.043,8.621) 24.058,8.606 U5.31 ; C93.2 31.613,4.155 X2.2 ; U8.0 32.365,25.843 U8.2 ; v2(32.247,6.259) 32.247,5.868 X2.2 ; R34.2 33.634,5.329 X2.2
  Top Layer w0.508: C48.1 C47.1 9.705,11.589 C46.1 ; v1(24.373,20.178) 24.551,20.356 R37.2
  Bottom Layer w0.254: v2(11.165,30.846) 11.169,30.849 MCU1.63 ; C8.2 v1(19.827,34.529) 20.099,34.257 MCU1.12 ; MCU1.18 25.747,30.849 C5.1
  other v1: 24.221,2.093 25.237,2.093 23.179,2.119 21.046,2.398 18.861,2.652 19.776,2.677 26.837,2.957 20.385,3.363 9.5,3.5 10.5,3.5 11.5,3.5 27.167,3.871 33.263,3.871 20.868,3.922 9.5,4.5 10.5,4.5 11.5,4.5 2.169,4.565 0.853,4.582 3.393,4.633 17.439,4.633 16.601,4.709 34.711,4.735 9.5,5.5 10.5,5.5 11.5,5.5 10.479,6.208 21.662,6.656 23.062,6.656 27.497,6.716 10.479,6.995 10.479,7.859 23.062,8.056 20.792,8.164 2.169,9.565 0.929,9.586 9.717,9.586 3.393,9.612 17.566,10.018 18.684,10.018 9.667,10.805 20.829,11.242 27.726,11.364 34.305,12.583 31.333,12.634 32.857,14.463 34.355,15.276 9.184,15.403 8.244,15.53 31.333,16.571 34.279,16.597 9.362,17.054 14.467,17.638 27.853,17.79 9.565,18.451 12.994,20.661 6.339,21.55 5.374,21.575 8.32,21.575 9.311,21.575 30.876,21.651 29.885,21.753 4.206,22.286 25.872,22.388 32.501,22.642 34.279,23.302 8.295,23.607 34.279,23.988 28.209,24.166 8.295,24.293 28.209,25.563 32.12,25.588 31.384,25.614 32.933,25.614 6.085,25.715 6.771,25.715 5.323,25.741 28.183,26.68 30.444,27.315 4.358,27.493 30.393,28.052 4.358,28.179 31.561,28.992 14.772,29.17 5.374,29.246 9.235,29.271 31.561,29.754 5.323,29.932 34.203,30.668 5.349,30.871 26.481,31.049 34.254,31.227 5.349,31.608 11.343,33.157 34.228,33.437 5.399,33.564 24.729,33.97 10.733,34.021 34.254,34.097 5.349,34.275 19.827,35.443 32.171,36.104 31.511,36.205 6.034,36.332 5.374,36.409 23.23,36.51 29.225,36.586 17.896,36.612 30.723,36.612 9.921,36.637 30.012,36.637 8.168,36.663 8.93,36.815 13.731,36.917 31.46,37.145 32.171,37.221 21.859,37.323 5.323,37.45 6.034,37.552 12.613,37.552 28.463,37.628 22.544,37.704 27.828,37.882 32.196,38.034 32.831,38.034 6.009,38.263 6.669,38.288 32.196,39.203 18.506,39.253 32.806,39.253 6.034,39.406 6.695,39.482 17.261,39.838 34,43.825 2.859,43.876 7.838,44.003 29.047,44.003 29.046,45.235 34.046,45.235 2.884,45.252 7.884,45.252 2.91,46.518 7.889,46.67 29.047,46.772 34.051,46.797
KEY1: MCU1.26 R15.2 SW3.1 | length 10.6
  Top Layer w0.254: v2(22.316,27.392) 22.316,28.001 25.313,30.998 25.313,32.497 25.832,33.016 26.05,33.016 ; R15.2 26.05,33.016 ; SW3.1 26.05,33.016
  Bottom Layer w0.254: v2(22.316,27.392) 22.858,26.849 MCU1.26
KEY2: MCU1.27 R14.2 SW2.1 | length 14.8
  Top Layer w0.254: SW2.1 21.459,36.561 R14.2 22.925,35.875 22.925,29.347 21.427,27.849 v2(21.427,27.29)
  Bottom Layer w0.254: v2(21.427,27.29) 21.376,27.239 22.266,26.349 MCU1.27
KEY3: MCU1.28 R24.2 SW1.1 | length 7
  Top Layer w0.254: SW1.1 21.489,22.591 21.732,22.591 ; v2(21.757,25.512) 21.757,22.616 21.732,22.591 ; R24.2 21.732,22.591
  Bottom Layer w0.254: v2(21.757,25.512) 22.094,25.849 MCU1.28
KEY4: MCU1.56 R27.2 SW4.1 | length 6.7
  Top Layer w0.254: R27.2 v2(15.513,30.465) SW4.1
  Bottom Layer w0.254: MCU1.56 14.171,27.349 15.513,28.691 v2(15.513,30.465)
KEY5: MCU1.57 R19.2 SW5.1 | length 7.9
  Top Layer w0.254: v2(11.343,28.509) 12.682,29.848 SW5.1 12.08,32.986 R19.2
  Bottom Layer w0.254: v2(11.343,28.509) 11.343,28.128 11.622,27.849 MCU1.57
NetAnt1_1: Ant1.1 C24.1 | length 1.5
  Top Layer w0.508: C24.1 31.546,42.549 Ant1.1
NetAnt2_1: Ant2.1 C50.2 | length 1.6
  Top Layer w0.508: Ant2.1 3.409,7.025 C50.2
NetAnt13_1: Ant13.1 C17.1 | length 1.3
  Top Layer w0.508: Ant13.1 5.395,44.042 C17.1
NetC2_2: C2.2 R3.1 U1.1 U1.3 | length 6.4
  Bottom Layer w0.254: U1.3 32.171,3.439 32.527,3.795 32.527,4.303 C2.2@33.39,5.167 ; U1.1 33.375,5.355 C2.2@33.39,5.37 ; R3.1 C2.2@33.39,5.37 ; C2.2 C2.2@33.39,5.167 ; C2.2@33.39,5.167 C2.2@33.39,5.37
NetC9_1: C9.1 MCU1.5 R8.2 X1.3 | length 9.3
  Bottom Layer w0.254: C9.1 14.023,38.844 X1.3 14.513,39.207 15.509,38.212 15.509,36.266 R8.2 15.047,35.753 16.599,34.201 MCU1.5
NetC11_1: C11.1 MCU1.47 | length 2.3
  Bottom Layer w0.254: MCU1.47 15.099,19.914 C11.1@15.199,19.813
NetC12_1: C12.1 MCU1.6 R8.1 X1.1 | length 7.1
  Bottom Layer w0.254: MCU1.6 17.099,34.76 R8.1 16.055,36.944 X1.1 17.03,37.92 C12.1
NetC14_2: C14.2 R2.1 U2.1 U2.3 | length 7
  Bottom Layer w0.508: U2.3 26.329,36.993 26.024,37.298 26.024,38.517 26.415,38.908 U2.1 30.168,38.908 R2.1
NetC15_2: C15.2 C67.2 FB1.2 L16.1 | length 2.8
  Top Layer w0.254: L16.1 C15.2@8.586,35.52 ; C15.2 C15.2@8.586,35.52 ; FB1.2 8.586,34.593 C15.2@8.586,35.52 ; C67.2 9.498,35.52 C15.2@8.586,35.52
NetC16_1: C16.1 R5.2 R7.1 R9.1 | length 3.5
  Top Layer w0.381: R5.2 6.741,28.734 C16.1
NetC16_2: C16.2 U3.1 | length 0.9
  Top Layer w0.254: U3.1 6.83,27.613 C16.2
NetC17_2: C17.2 L20.1 | length 0.8
  Top Layer w0.508: L20.1 C17.2
NetC18_2: C18.2 C20.2 FB6.2 U3.7 | length 4
  Top Layer w0.254: C18.2 C20.2 ; U3.7 6.33,22.981 C20.2 ; FB6.2 7.046,22.977 C20.2
NetC19_2: C19.2 C21.2 FB2.2 L1.1 | length 3.1
  Top Layer w0.254: FB2.2 28.813,35.354 L1.1
NetC22_1: C22.1 U3.8 | length 0.9
  Top Layer w0.254: U3.8 6.83,23.987 C22.1
NetC23_2: C23.2 U3.3 | length 1.1
  Top Layer w0.254: C23.2 5.83,27.646 U3.3
NetC24_2: C24.2 L2.1 | length 0.8
  Top Layer w0.508: L2.1 C24.2
NetC25_1: C25.1 C31.1 MCU1.30 | length 3.9
  Bottom Layer w0.254: MCU1.30 26.483,24.849 C31.1 C25.1
NetC26_2: C26.2 C27.2 FB7.2 U8.7 | length 7.7
  Top Layer w0.254: FB7.2 30.977,20.635 31.536,21.194 31.536,23.074 31.511,23.099 ; C26.2@31.003,23.099 31.511,23.099 ; U8.7 32.365,23.954 31.511,23.099
NetC28_1: C28.1 R10.2 R12.1 R35.1 | length 3.3
  Top Layer w0.381: C28.1 R10.2
NetC28_2: C28.2 U8.1 | length 0.9
  Top Layer w0.254: U8.1 32.865,27.511 C28.2
NetC29_1: C29.1 U8.8 | length 0.9
  Top Layer w0.254: U8.8 32.865,23.86 C29.1@33.012,23.713
NetC30_2: C30.2 U8.3 | length 1.1
  Top Layer w0.254: C30.2 31.865,27.545 U8.3
NetC32_2: C32.2 MCU1.7 R4.1 | length 3
  Bottom Layer w0.254: MCU1.7 17.599,34.85 C32.2 17.899,35.151 R4.1
NetC33_1: C33.1 MCU1.31 | length 3
  Bottom Layer w0.254: MCU1.31 25.371,24.349 26.287,23.434 C33.1
NetC36_1: C36.1 C37.1 FB3.1 U5.16 U5.17 | length 5.1
  Top Layer w0.254: FB3.1 18.278,4.02 C37.1 C36.1 C36.1@19.862,4.111 ; U5.16 C36.1@19.862,4.111 ; U5.17 20.606,4.856 C36.1@19.862,4.111
NetC38_1: C38.1 C39.1 C40.1 C41.1 FB5.1 U5.6 U5.10 | length 8.6
  Top Layer w0.254: C40.1 17.869,8.606 U5.10 ; U5.6 21.612,10.316 21.554,10.374 v2(21.63,10.45)
  Bottom Layer w0.254: v2(19.014,8.646) 19.115,8.646 19.827,9.358 21.254,9.358 C38.1 21.655,9.472 ; v2(21.63,10.45) 21.63,9.497 21.655,9.472 ; FB5.1 23.053,9.472 C39.1 21.655,9.472
NetC42_1: C42.1 C45.1 FB4.2 L3.1 L4.1 L5.1 L6.1 | length 6.1
  Top Layer w0.254: FB4.2 16.14,6.052 C45.1 16.633,6.089 L5.1
  Bottom Layer w0.254: L3.1 18.255,5.39 L4.1 L6.1
  other v1: 17.972,6.081
NetC46_2: C46.2 C47.2 C48.2 FB8.2 L7.1 | length 6.2
  Top Layer w0.508: FB8.2 7.681,11.953 C46.2 8.697,10.937 C47.2 C48.2 7.72,9.057 L7.1
NetC50_1: C50.1 L7.2 U7.3 | length 3
  Top Layer w0.508: C50.1 5.996,7 U7.3
NetC51_1: C51.1 C52.1 R28.2 U5.7 | length 21.5
  Top Layer w0.152: C52.1 v2(19.398,11.745) C51.1 20.063,10.577 20.868,10.577 21.112,10.333 U5.7
  Top Layer w0.254: v2(21.224,0.772) 21.244,0.752 R28.2
  Bottom Layer w0.254: v2(19.398,11.745) 17.82,11.745 15.407,9.332 15.407,4.684 19.319,0.772 v2(21.224,0.772)
NetC52_2: C52.2 R31.2 | length 0.8
  Top Layer w0.152: C52.2 R31.2
NetC54_1: C54.1 U5.24 | length 1.8
  Top Layer w0.254: U5.24 25.232,3.735 C54.1
NetC55_1: C55.1 U5.19 | length 1.2
  Top Layer w0.254: U5.19 21.612,3.703 C55.1
NetC56_1: C56.1 U5.23 | length 1.6
  Top Layer w0.254: U5.23 23.612,4.116 C56.1
NetC57_1: C57.1 X2.3 | length 1.2
  Top Layer w0.254: C57.1 30.972,5.343 X2.3
NetC113_1: C113.1 L5.2 U5.13 | length 5.8
  Top Layer w0.305: C113.1@14.099,7.025 14.179,7.106 U5.13
NetC113_2: C113.2 U7.1 | length 1.1
  Top Layer w0.508: U7.1 12.097,7.097 C113.2
NetL1_2: L1.2 R10.1 R11.1 U4.6 | length 3.9
  Top Layer w0.381: U4.6 32.842,32.868 R10.1
NetL2_2: L2.2 U4.3 | length 1.1
  Top Layer w0.381: L2.2 31.542,39.687 U4.3
NetL3_2: L3.2 U5.15 | length 1.3
  Top Layer w0.152: v2(19.084,5.524) 18.976,5.632 18.976,5.661 19.42,6.106 U5.15
NetL4_2: L4.2 U5.14 | length 0.8
  Top Layer w0.152: v2(19.09,6.538) 19.09,6.564 19.132,6.606 U5.14
NetL6_2: L6.2 U5.12 | length 1.1
  Top Layer w0.152: v2(18.938,7.935) 18.938,7.961 18.963,7.961 19.318,7.606 U5.12
NetL16_2: L16.2 R5.1 R6.1 U10.6 | length 3.8
  Top Layer w0.381: U10.6 6.68,35.509 6.69,35.499 6.69,33.129 R5.1
NetL20_2: L20.2 U10.3 | length 1.1
  Top Layer w0.381: U10.3 5.38,39.878 L20.2
NetLED1_2: LED1.2 R20.2 | length 1.3
  Bottom Layer w0.254: LED1.2 R20.2
NetLED2_2: LED2.2 R22.2 | length 1.3
  Bottom Layer w0.254: LED2.2 R22.2
NetLED3_1: LED3.1 MCU1.24 U5.25 | length 33.5
  Top Layer w0.254: U5.25 29.181,5.606 29.936,6.36 v2(29.936,6.513) ; v2(27.574,28.052) 27.574,20.725 LED3.1 26.685,15.987 31.104,11.567 v2(31.104,10.424)
  Bottom Layer w0.254: MCU1.24 27.371,27.849 v2(27.574,28.052) ; v2(29.936,6.513) 31.104,7.681 v2(31.104,10.424)
NetLED3_2: LED3.2 R37.1 | length 2
  Top Layer w0.254: LED3.2 LED3.2@26.743,21.491
  Top Layer w0.508: R37.1 26.499,21.364 LED3.2
NetMCU1_20: MCU1.20 U3.4 U3.5 | length 25.4
  Top Layer w0.254: U3.5 4.998,24.72 4.739,24.979 v2(4.739,26.477) 4.982,26.72 U3.4 ; v2(10.454,24.09) 14.035,24.09 v2(19.776,29.83)
  Bottom Layer w0.254: v2(4.739,26.477) 8.066,26.477 v2(10.454,24.09) ; v2(19.776,29.83) 23.879,29.83 MCU1.20
NetMCU1_21: MCU1.21 U8.4 U8.5 | length 11.1
  Top Layer w0.254: v2(30.596,26.249) 30.723,26.249 v2@30.774,26.299 ; U8.5 31.033,24.593 30.774,24.852 v2@30.774,26.299 ; U8.4 31.067,26.593 v2@30.774,26.299
  Bottom Layer w0.254: MCU1.21 23.901,29.347 27.65,29.347 30.596,26.401 v2(30.596,26.249)
NetMCU1_25: MCU1.25 U5.26 | length 31.4
  Top Layer w0.254: U5.26 28.284,6.106 v2(28.64,6.462)
  Bottom Layer w0.254: MCU1.25 28.987,27.349 29.352,26.985 29.352,21.169 30.571,19.949 30.571,8.392 v2(28.64,6.462)
NetMCU1_33: MCU1.33 U5.3 | length 13.7
  Top Layer w0.254: U5.3 23.112,10.535 24.018,11.44 24.018,15.555 23.256,16.317 23.256,20.61 v2(23.23,20.635)
  Bottom Layer w0.254: MCU1.33 22.099,21.208 22.671,20.635 v2(23.23,20.635)
NetMCU1_34: MCU1.34 U5.1 | length 14.7
  Top Layer w0.254: U5.1 24.112,10.011 25.846,11.745 25.846,12.71 25.592,12.964 25.592,16.241 v2(25.567,16.266)
  Bottom Layer w0.254: MCU1.34 21.599,21.022 25.415,17.206 25.415,16.52 25.567,16.368 v2(25.567,16.266)
NetMCU1_35: MCU1.35 U5.30 | length 18.5
  Top Layer w0.254: U5.30 26.017,8.106 26.913,9.002 v2(26.913,10.196) ; v2(24.915,16.266) 24.915,16.17 25.092,15.992 25.092,12.423 25.135,12.38 v2(25.135,12.507)
  Bottom Layer w0.254: MCU1.35 21.099,20.948 24.915,17.132 v2(24.915,16.266) ; v2(25.135,12.507) 25.796,12.507 26.913,11.39 v2(26.913,10.196)
NetMCU1_36: MCU1.36 U5.2 | length 14.4
  Top Layer w0.254: U5.2 23.612,10.45 24.592,11.431 24.592,15.84 24.262,16.17 v2(24.262,16.266)
  Bottom Layer w0.254: MCU1.36 20.599,20.873 24.415,17.057 24.415,16.52 24.262,16.368 v2(24.262,16.266)
NetMCU1_37: MCU1.37 R20.1 | length 2.4
  Bottom Layer w0.254: MCU1.37 20.099,19.974 R20.1
NetMCU1_38: MCU1.38 R22.1 | length 2.8
  Bottom Layer w0.254: R22.1 19.599,20.967 MCU1.38
NetMCU1_60: MCU1.60 R18.2 | length 2.2
  Bottom Layer w0.254: R18.2 10.701,29.349 MCU1.60
NetR13_1: R13.1 SW4.2 | length 1.5
  Top Layer w0.254: SW4.2 21.482,29.584 R13.1
NetR16_1: R16.1 SW2.2 | length 1.8
  Top Layer w0.254: R16.1 15.617,37.569 SW2.2
NetR17_1: R17.1 SW1.2 | length 1.6
  Top Layer w0.254: R17.1 15.647,23.599 SW1.2
NetR21_1: R21.1 SW3.2 | length 1.6
  Top Layer w0.254: SW3.2 25.169,27.047 R21.1
NetR23_1: R23.1 SW5.2 | length 1.8
  Top Layer w0.254: SW5.2 11.072,27.144 R23.1
NetR29_1: R29.1 U3.6 | length 2.4
  Top Layer w0.254: R29.1 4.223,23.683 5.425,23.683 5.83,24.089 U3.6
NetR30_1: R30.1 U5.4 | length 1.9
  Top Layer w0.152: U5.4 22.612,10.551 22.9,10.839 R30.1@22.9,11.618
NetR31_1: R31.1 R33.2 U5.5 | length 2.4
  Top Layer w0.152: U5.5 22.112,12.067 R31.1
NetR32_2: R32.2 U5.22 | length 1.4
  Top Layer w0.254: U5.22 23.112,3.608 R32.2
NetR34_1: R34.1 X2.1 | length 1.8
  Top Layer w0.254: X2.1 33.271,2.779 R34.1
NetR36_1: R36.1 U8.6 | length 2.9
  Top Layer w0.254: R36.1 29.91,23.139 30.582,23.81 31.522,23.81 31.865,24.154 U8.6
PA9: MCU1.42 P4.1 R25.1 | length 26.5
  Top Layer w0.254: P4.1 3.342,15.885 3.342,17.206 5.145,19.01 17.541,19.01 17.867,19.336 17.867,20.461 v2(17.795,20.534)
  Bottom Layer w0.254: P4.1 2.039,14.336 R25.1 ; MCU1.42 17.599,20.73 v2(17.795,20.534)
PA10: MCU1.43 P4.2 R26.1 | length 21.4
  Top Layer w0.254: P4.2 4.536,19.619 v2(17.337,19.619)
  Bottom Layer w0.254: P4.2 2.41,17.494 R26.1 ; MCU1.43 17.099,19.858 v2(17.337,19.619)
SWCLK: MCU1.49 P3.CC1 | length 20.4
  Bottom Layer w0.254: MCU1.49 13.219,23.429 22.113,23.429 23.84,21.702 23.84,19.391 27.39,15.84 P3.CC1
SWDIO: MCU1.46 P3.CC2 | length 21.1
  Bottom Layer w0.254: MCU1.46 15.605,22.043 15.605,14.9 ; 15.724,14.781 15.605,14.9 ; P3.CC2 27.317,12.84 26.786,13.371 17.134,13.371 15.605,14.9
SWO: MCU1.55 P3.SBU1 P3.SBU2 | length 26.9
  Bottom Layer w0.254: MCU1.55 12.807,26.858 14.061,26.858 17.083,23.836 22.281,23.836 24.932,21.185 24.932,18.959 27.551,16.34 P3.SBU2 29.527,16.34 29.529,16.343 30.114,15.758 30.114,13.904 29.549,13.34 P3.SBU1
TYPEC_N: MCU1.44 P3.DN | length 22.3
  Bottom Layer w0.254: MCU1.44 16.599,15.405 17.668,14.336 25.897,14.336 26.909,15.348 P3.DN@28.553,15.348 ; P3.DN@28.553,14.34 29.356,14.34 29.555,14.539 29.555,15.174 29.389,15.34 P3.DN@28.553,15.34
TYPEC_P: MCU1.45 P3.DP | length 21.9
  Bottom Layer w0.254: MCU1.45 16.099,15.187 17.457,13.828 26.108,13.828 26.945,14.665 27.623,14.665 ; P3.DP@28.553,13.832 28.531,13.853 27.802,13.853 27.623,14.032 27.623,14.665 ; P3.DP@28.553,14.84 27.798,14.84 27.623,14.665
VTUNE: C53.1 R28.1 U5.20 | length 3.2
  Top Layer w0.254: R28.1 22.125,1.777 C53.1 22.214,2.847 22.214,4.201 22.112,4.304 U5.20
pads on no net: MCU1.2 MCU1.3 MCU1.4 MCU1.8 MCU1.9 MCU1.10 MCU1.11 MCU1.14 MCU1.15 MCU1.16 MCU1.17 MCU1.22 MCU1.23 MCU1.29 MCU1.39 MCU1.40 MCU1.41 MCU1.50 MCU1.51 MCU1.52 MCU1.53 MCU1.54 MCU1.58 MCU1.59 MCU1.61 MCU1.62 SW1.3 SW1.4 SW2.3 SW2.4 SW3.3 SW3.4 SW4.3 SW4.4 SW5.3 SW5.4 U1.4 U2.4 U6.4
copper on no net:
  other v1: 19.903,9.891

## Polygon pours and split planes (outlines as drawn)
GND on Internal Plane 1 (split plane): 35.162,47.086 35.23,47.065 35.293,47.032 35.348,46.986 35.393,46.931 35.427,46.868 35.447,46.8 35.454,46.737 35.453,46.729 35.453,0.812 35.454,0.803 35.447,0.741 35.427,0.673 35.393,0.61 35.348,0.555 35.293,0.509 35.23,0.476 35.162,0.455 35.099,0.449 35.091,0.45 0.857,0.45 0.849,0.449 0.786,0.455 0.718,0.476 0.655,0.509 0.6,0.555 0.555,0.61 0.521,0.673 0.501,0.741 0.494,0.803 0.495,0.812 0.495,46.729 0.494,46.737 0.501,46.8 0.521,46.868 0.555,46.931 0.6,46.986 0.655,47.032 0.718,47.065 0.786,47.086 0.849,47.092 0.857,47.091 35.091,47.091 35.099,47.092
3.3D on Internal Plane 2 (split plane): 26.533,14.792 9.538,14.792 9.538,37.248 26.533,37.248
3.3Synth on Internal Plane 2 (split plane): 30.343,0.45 14.314,0.45 14.314,10.629 30.343,10.629
3.3A on Internal Plane 2 (split plane): 28.896,21.193 26.836,21.193 26.836,37.399 26.831,37.438 26.816,37.475 26.792,37.506 26.76,37.53 26.724,37.545 26.685,37.55 9.387,37.55 9.348,37.545 9.312,37.53 9.28,37.506 9.256,37.475 9.241,37.438 9.236,37.399 9.236,20.101 6.287,20.101 6.287,39.991 28.896,39.991
5V on Internal Plane 2 (split plane): 35.162,47.086 35.23,47.065 35.293,47.032 35.348,46.986 35.393,46.931 35.427,46.868 35.447,46.8 35.454,46.737 35.453,46.729 35.453,0.812 35.454,0.803 35.447,0.741 35.427,0.673 35.393,0.61 35.348,0.555 35.293,0.509 35.23,0.476 35.162,0.455 35.099,0.449 35.091,0.45 30.646,0.45 30.646,10.78 30.641,10.819 30.626,10.856 30.602,10.887 30.57,10.911 30.534,10.926 30.495,10.931 14.162,10.931 14.123,10.926 14.087,10.911 14.055,10.887 14.031,10.856 14.016,10.819 14.011,10.78 14.011,0.45 0.857,0.45 0.849,0.449 0.786,0.455 0.718,0.476 0.655,0.509 0.6,0.555 0.555,0.61 0.521,0.673 0.501,0.741 0.494,0.803 0.495,0.812 0.495,46.729 0.494,46.737 0.501,46.8 0.521,46.868 0.555,46.931 0.6,46.986 0.655,47.032 0.718,47.065 0.786,47.086 0.849,47.092 0.857,47.091 35.091,47.091 35.099,47.092

## Keep-outs
Keep-Out Layer:
  rectangle: -33,-17 0,0
  lines w0.254: 0.857,47.729 35.173,47.729 ; 0.857,47.729 ccw(c0.857,46.729) -0.143,46.729 -0.143,0.812 ccw(c0.857,0.812) 0.857,-0.188 35.091,-0.188 ccw(c35.091,0.812) 36.091,0.812 36.091,46.812 ; 35.091,47.729 cw(c35.091,46.729) 36.091,46.729

## Other copper
Internal Plane 2 (plane layer: these items are gaps in the copper):
  lines w0.3: 9.387,19.949 6.136,19.949 6.136,40.142 29.047,40.142 29.047,21.042 26.685,21.042 ; 14.162,-0.188 14.162,10.78 14.34,10.78 30.495,10.78 30.495,-0.188 36.091,-0.188 ; 9.387,14.641 26.685,14.641 26.685,37.399 9.387,37.399 9.387,14.641